# Altium PCB PCB_carte.PcbDoc
Units mil, origin at the board's own origin, x right, y up, seen from the top; angles counter-clockwise.
Board outline 590.55 x 590.55 mil, 2 copper layers (Top Layer, Bottom Layer); 2 components, 4 nets, 12 pads, 0 vias.
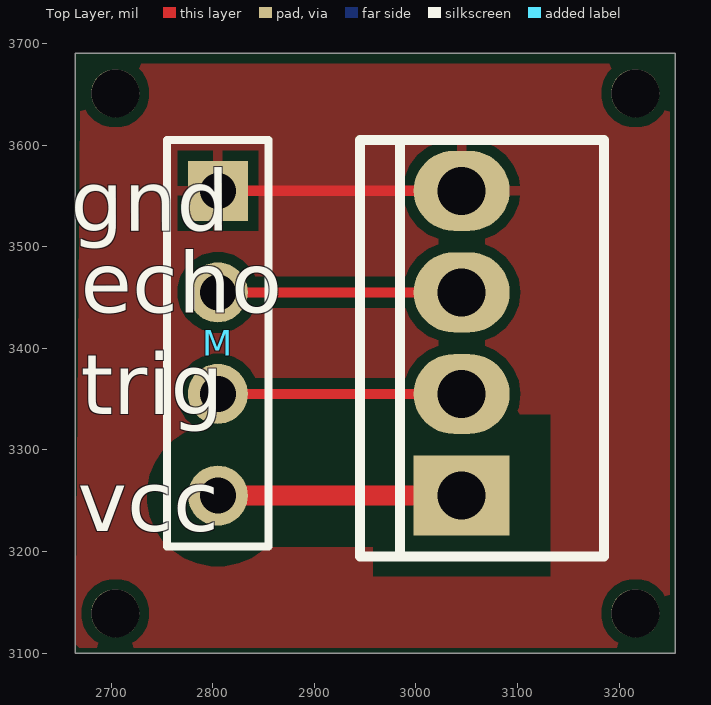
[diagram p0: Top Layer view]
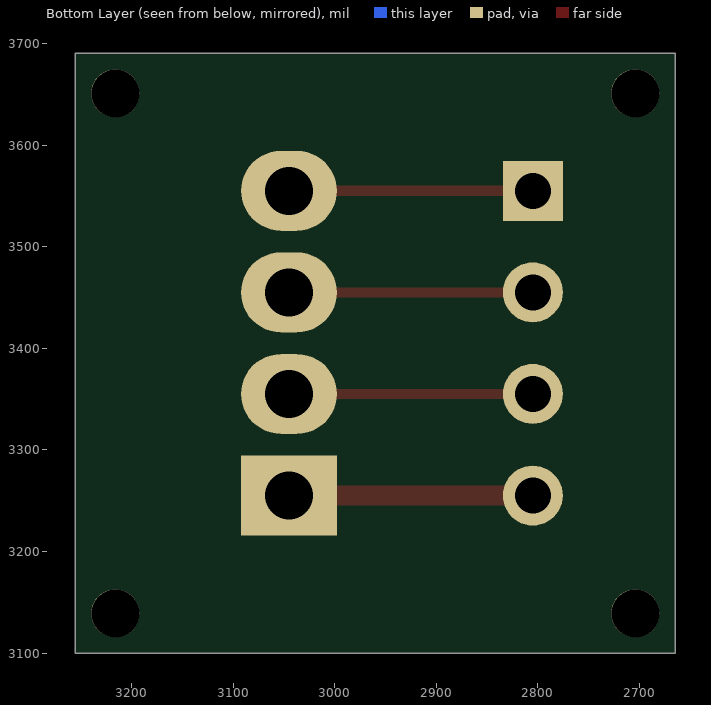
[diagram p1: Bottom Layer view, seen from below]

## Layer stack, top to bottom
Top Solder: solder mask 0.4, Solder Resist, Dk 3.5
Top Layer: signal copper 1.4
Dielectric 1: dielectric 12.6, FR-4, Dk 4.8
Bottom Layer: signal copper 1.4
Bottom Solder: solder mask 0.4, Solder Resist, Dk 3.5

## Board outline
3255.28,3099.72 3255.28,3690.28 2664.72,3690.28 2664.72,3099.72

## Design rules (kind name [scope] priority, off if disabled: settings)
Clearance Clearance_1 [InNetClass('POWER')] p1: gap=10 ignorepadtopadclearanceinfootprint=FALSE except(0: Arc-Hole Track-Hole SMDPad-Hole THPad-Hole Via-Hole Fill-Hole Poly-Hole Region-Hole Text-Hole; 40: Arc-Poly Track-Poly SMDPad-Poly THPad-Poly Via-Poly Fill-Poly Poly-Poly)
Clearance [All] p2: gap=10 ignorepadtopadclearanceinfootprint=FALSE except(0: Arc-Hole Track-Hole SMDPad-Hole THPad-Hole Via-Hole Fill-Hole Poly-Hole Region-Hole Text-Hole)
PolygonConnect [All] p1: connectstyle=Relief reliefconductorwidth=10 reliefentries=4 polygonreliefangle="90 Angle" airgapwidth=10
RoutingVias [All] p1: holewidth=28 width=50 viastyle="Through Hole" minholewidth=28 minwidth=50 maxholewidth=28 maxwidth=50
SolderMaskExpansion [All] p1: expansion=4 istentingtop=FALSE
Width Width_1 [InNetClass('POWER')] p1: maxlimit=20 minlimit=10 preferedwidth=20 bottomlayer_minwidth=20 minimp=50.000000 maximp=50.000000 favimp=50.000000
Width [All] p2: maxlimit=10 minlimit=10 preferedwidth=10
30 further rules are at their usual default settings.

## Classes and differential pairs
net class POWER: Net_1

## Components (designator, comment, footprint, x,y, rotation, side; value= is the part's Value field where it differs from the comment)
M "PIN_USER_INT" HDR1X4 2805,3555 r270 top
? "CAPTEUR" MOLEX-KK-22-27-2041 3045,3405 r90 top

## Footprints (in the part's own frame and the unit in brackets; to place one, negate y for a bottom-side part, rotate by r counter-clockwise, add the part's x,y. Pads: shape width x height; smd on the part's side, far side on the other; paste and mask are expansions set on the pad)
HDR1X4 [mm] "Connector; Header; 4 Position"
  rect 1.5x1.5 hole 0.9: 1(0,0)
  round 1.5 hole 0.9: 2(2.54,0) 3(5.08,0) 4(7.62,0)
  silkscreen extent -1.27,-1.27 8.89,1.27
MOLEX-KK-22-27-2041 [mm] "2.54mm (.100\") Pitch KK® Wire-to-Board Header, Vertical, with Friction Lock, 4 Circuits"
  rect 2x2.4 hole 1.2: 1(-3.81,0)
  oval 2x2.4 hole 1.2: 2(-1.27,0) 3(1.27,0) 4(3.81,0)
  silkscreen extent -5.33,-3.56 5.08,2.54, body extent -5.08,-3.33 5.08,2.47, height 11.54

## Part data
M: library part "Header 4", "Header, 4-Pin", LatestRevisionDate=17-Jul-2002, LatestRevisionNote="Re-released for DXP Platform.", Publisher="Altium Limited"
?: library part MOLEX_KK_4CTS_VERTICAL, "2.54mm (.100\") Pitch KK® Wire-to-Board Header, Vertical, with Friction Lock, 4 Circuits", Supplier Part Number 1=4838483P, Supplier 1=RSComponents

## Free pads (board coordinates)
  round 47.24 hole 47.24: 1(2704.09,3139.09) 1(2704.09,3650.91) 1(3215.91,3139.09) 1(3215.91,3650.91)

## Nets (pads, with @x,y where several pads share a name; then routed paths per layer and width w, separated by ;. In a path a pad name is that pad's centre, name@x,y a point inside that pad or via, vN(x,y) a via of type N, cw(c..) or ccw(c..) an arc to the next point about the centre after c; other vN are vias at no path point)
GND: ?.4 M.1 | length 240
  Top Layer w10: M.1 ?.4
Net_1: ?.1 M.4 | length 240
  Top Layer w20: M.4 ?.1
Net_2: ?.2 M.3 | length 240
  Top Layer w10: M.3 ?.2
Net_3: ?.3 M.2 | length 240
  Top Layer w10: M.2 ?.3

## Polygon pours and split planes (outlines as drawn)
GND on Top Layer "GND_L01_P000" (solid, remove dead copper, pour order 0): 2670,3685 2675,3680 3250,3680 3250,3110 3245,3105 2665,3105

## Silkscreen, mask and mechanical layers (free items; w line width, h text height)
Top Overlay:
  text "gnd" at 2660,3515 h60 r0.18
  text "echo" at 2670,3435 h60
  text "trig" at 2670,3335 h60
  text "vcc" at 2667.3,3220 h60